# Altium PCB pcb.PcbDoc (part 6 of 6)
Units mm, origin at the board's own origin, x right, y up, seen from the top; angles counter-clockwise.
Board outline 163.6 x 137.4 mm, 4 copper layers (Top Layer, GND2, GND3, Bottom Layer), stack 1.586 mm thick; 362 components, 323 nets, 1261 pads, 657 vias.
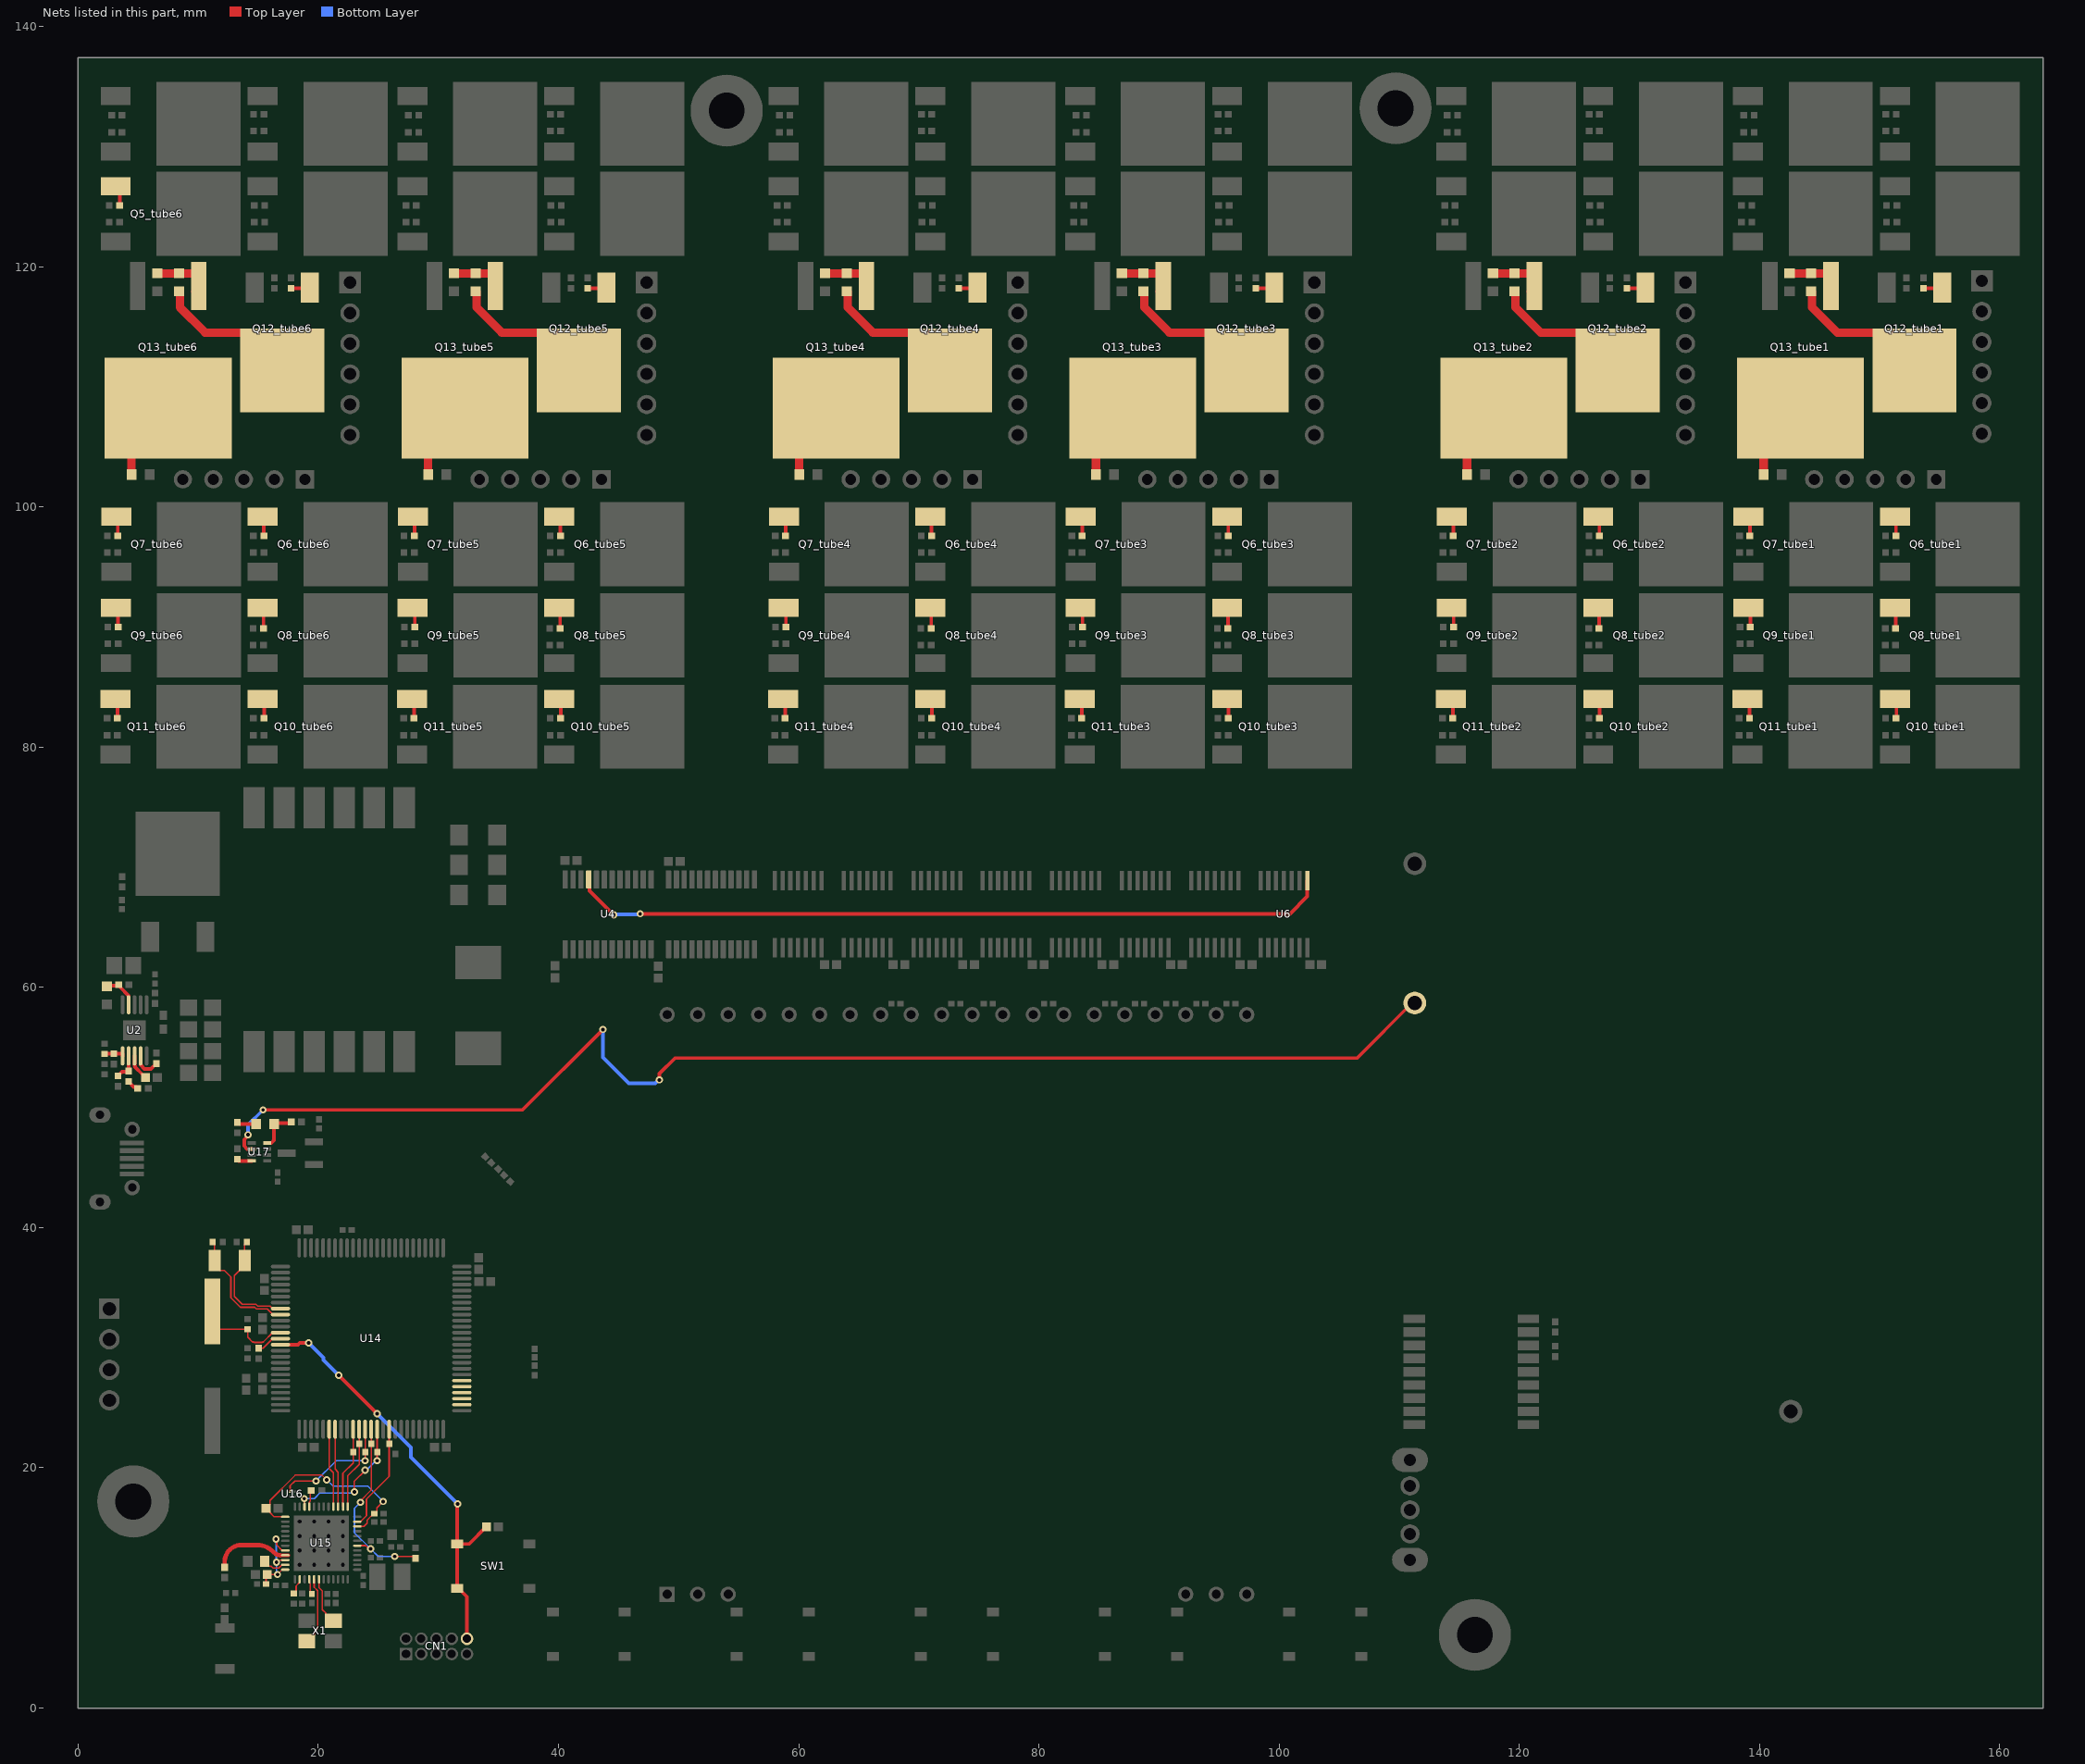
[diagram p7: the nets of this part, all layers, seen from the top]

## Via types
v1: diameter 0.6, hole 0.3, Top Layer to Bottom Layer, 545 vias
v2: diameter 1.27, hole 0.6, Top Layer to Bottom Layer, 97 vias
v3: diameter 1.27, hole 0.711, Top Layer to Bottom Layer, 13 vias
v4: diameter 0.5, hole 0.2, Top Layer to Bottom Layer, 2 vias

## Nets (pads, with @x,y where several pads share a name; then routed paths per layer and width w, separated by ;. In a path a pad name is that pad's centre, name@x,y a point inside that pad or via, vN(x,y) a via of type N, cw(c..) or ccw(c..) an arc to the next point about the centre after c; other vN are vias at no path point) (continued)
NetQ5_tube6_1: Q5_tube6.1 R18_tube6.2 | length 2.7
  Top Layer w0.3: R18_tube6.2@3.458,125.1 Q5_tube6.1@3.458,126.379 ; Q5_tube6.1@3.325,126.7 cw(c3.004,126.379) Q5_tube6.1@3.458,126.379 ; Q5_tube6.1@3.325,126.7 cw(c3.004,126.379) Q5_tube6.1@3.458,126.379 ; Q5_tube6.1@3.325,126.7 cw(c3.004,126.379) Q5_tube6.1@3.458,126.379 ; Q5_tube6.1@3.325,126.7 cw(c3.004,126.379) Q5_tube6.1@3.458,126.379
NetQ6_tube1_1: Q6_tube1.1 R20_tube1.2 | length 1.6
  Top Layer w0.3: Q6_tube1.1@151.269,99.2 cw(c151.037,98.968) 151.366,98.968 R20_tube1.2@151.366,97.6
NetQ6_tube2_1: Q6_tube2.1 R20_tube2.2 | length 1.6
  Top Layer w0.3: Q6_tube2.1@126.569,99.2 cw(c126.337,98.968) 126.666,98.968 R20_tube2.2@126.666,97.6
NetQ6_tube3_1: Q6_tube3.1 R20_tube3.2 | length 1.6
  Top Layer w0.3: Q6_tube3.1@95.669,99.2 cw(c95.437,98.968) 95.766,98.968 R20_tube3.2@95.766,97.6
NetQ6_tube4_1: Q6_tube4.1 R20_tube4.2 | length 1.6
  Top Layer w0.3: Q6_tube4.1@70.969,99.2 cw(c70.737,98.968) 71.066,98.968 R20_tube4.2@71.066,97.6
NetQ6_tube5_1: Q6_tube5.1 R20_tube5.2 | length 1.6
  Top Layer w0.3: Q6_tube5.1@40.069,99.2 cw(c39.837,98.968) 40.166,98.968 R20_tube5.2@40.166,97.6
NetQ6_tube6_1: Q6_tube6.1 R20_tube6.2 | length 1.6
  Top Layer w0.3: Q6_tube6.1@15.369,99.2 cw(c15.137,98.968) 15.466,98.968 R20_tube6.2@15.466,97.6
NetQ7_tube1_1: Q7_tube1.1 R22_tube1.2 | length 1.6
  Top Layer w0.3: Q7_tube1.1@139.067,99.2 cw(c138.747,98.879) 139.2,98.879 R22_tube1.2@139.2,97.6
NetQ7_tube2_1: Q7_tube2.1 R22_tube2.2 | length 1.6
  Top Layer w0.3: Q7_tube2.1@114.367,99.2 cw(c114.047,98.879) 114.5,98.879 R22_tube2.2@114.5,97.6
NetQ7_tube3_1: Q7_tube3.1 R22_tube3.2 | length 1.6
  Top Layer w0.3: Q7_tube3.1@83.467,99.2 cw(c83.147,98.879) 83.6,98.879 R22_tube3.2@83.6,97.6
NetQ7_tube4_1: Q7_tube4.1 R22_tube4.2 | length 1.6
  Top Layer w0.3: Q7_tube4.1@58.767,99.2 cw(c58.447,98.879) 58.9,98.879 R22_tube4.2@58.9,97.6
NetQ7_tube5_1: Q7_tube5.1 R22_tube5.2 | length 1.6
  Top Layer w0.3: Q7_tube5.1@27.867,99.2 cw(c27.547,98.879) 28,98.879 R22_tube5.2@28,97.6
NetQ7_tube6_1: Q7_tube6.1 R22_tube6.2 | length 1.6
  Top Layer w0.3: Q7_tube6.1@3.167,99.2 cw(c2.847,98.879) 3.3,98.879 R22_tube6.2@3.3,97.6
NetQ8_tube1_1: Q8_tube1.1 R24_tube1.2 | length 1.6
  Top Layer w0.3: Q8_tube1.1@151.3,91.5 cw(c151.221,91.421) 151.333,91.421 R24_tube1.2@151.333,89.9
NetQ8_tube2_1: Q8_tube2.1 R24_tube2.2 | length 1.6
  Top Layer w0.3: Q8_tube2.1@126.6,91.5 cw(c126.521,91.421) 126.633,91.421 R24_tube2.2@126.633,89.9
NetQ8_tube3_1: Q8_tube3.1 R24_tube3.2 | length 1.6
  Top Layer w0.3: Q8_tube3.1@95.7,91.5 cw(c95.621,91.421) 95.733,91.421 R24_tube3.2@95.733,89.9
NetQ8_tube4_1: Q8_tube4.1 R24_tube4.2 | length 1.6
  Top Layer w0.3: Q8_tube4.1@71,91.5 cw(c70.921,91.421) 71.033,91.421 R24_tube4.2@71.033,89.9
NetQ8_tube5_1: Q8_tube5.1 R24_tube5.2 | length 1.6
  Top Layer w0.3: Q8_tube5.1@40.1,91.5 cw(c40.021,91.421) 40.133,91.421 R24_tube5.2@40.133,89.9
NetQ8_tube6_1: Q8_tube6.1 R24_tube6.2 | length 1.6
  Top Layer w0.3: Q8_tube6.1@15.4,91.5 cw(c15.321,91.421) 15.433,91.421 R24_tube6.2@15.433,89.9
NetQ9_tube1_1: Q9_tube1.1 R26_tube1.2 | length 1.6
  Top Layer w0.3: Q9_tube1.1@139.158,91.6 cw(c138.977,91.419) 139.233,91.419 R26_tube1.2@139.233,90
NetQ9_tube2_1: Q9_tube2.1 R26_tube2.2 | length 1.6
  Top Layer w0.3: Q9_tube2.1@114.458,91.6 cw(c114.277,91.419) 114.533,91.419 R26_tube2.2@114.533,90
NetQ9_tube3_1: Q9_tube3.1 R26_tube3.2 | length 1.6
  Top Layer w0.3: Q9_tube3.1@83.558,91.6 cw(c83.377,91.419) 83.633,91.419 R26_tube3.2@83.633,90
NetQ9_tube4_1: Q9_tube4.1 R26_tube4.2 | length 1.6
  Top Layer w0.3: Q9_tube4.1@58.858,91.6 cw(c58.677,91.419) 58.933,91.419 R26_tube4.2@58.933,90
NetQ9_tube5_1: Q9_tube5.1 R26_tube5.2 | length 1.6
  Top Layer w0.3: Q9_tube5.1@27.958,91.6 cw(c27.777,91.419) 28.033,91.419 R26_tube5.2@28.033,90
NetQ9_tube6_1: Q9_tube6.1 R26_tube6.2 | length 1.6
  Top Layer w0.3: Q9_tube6.1@3.258,91.6 cw(c3.077,91.419) 3.333,91.419 R26_tube6.2@3.333,90
NetQ10_tube1_1: Q10_tube1.1 R28_tube1.2 | length 2.9
  Top Layer w0.3: Q10_tube1.1@151.158,84 cw(c150.977,83.819) Q10_tube1.1@151.233,83.819 ; R28_tube1.2@151.398,82.33 Q10_tube1.1@151.398,83.69 ; Q10_tube1.1@151.269,84 cw(c150.959,83.69) Q10_tube1.1@151.398,83.69 ; Q10_tube1.1@151.269,84 cw(c150.959,83.69) Q10_tube1.1@151.398,83.69 ; Q10_tube1.1@151.269,84 cw(c150.959,83.69) Q10_tube1.1@151.398,83.69 ; Q10_tube1.1@151.269,84 cw(c150.959,83.69) Q10_tube1.1@151.398,83.69
NetQ10_tube2_1: Q10_tube2.1 R28_tube2.2 | length 2.9
  Top Layer w0.3: Q10_tube2.1@126.458,84 cw(c126.277,83.819) Q10_tube2.1@126.533,83.819 ; R28_tube2.2@126.698,82.33 Q10_tube2.1@126.698,83.69 ; Q10_tube2.1@126.569,84 cw(c126.259,83.69) Q10_tube2.1@126.698,83.69 ; Q10_tube2.1@126.569,84 cw(c126.259,83.69) Q10_tube2.1@126.698,83.69 ; Q10_tube2.1@126.569,84 cw(c126.259,83.69) Q10_tube2.1@126.698,83.69 ; Q10_tube2.1@126.569,84 cw(c126.259,83.69) Q10_tube2.1@126.698,83.69
NetQ10_tube3_1: Q10_tube3.1 R28_tube3.2 | length 2.9
  Top Layer w0.3: Q10_tube3.1@95.558,84 cw(c95.377,83.819) Q10_tube3.1@95.633,83.819 ; R28_tube3.2@95.798,82.33 Q10_tube3.1@95.798,83.69 ; Q10_tube3.1@95.669,84 cw(c95.359,83.69) Q10_tube3.1@95.798,83.69 ; Q10_tube3.1@95.669,84 cw(c95.359,83.69) Q10_tube3.1@95.798,83.69 ; Q10_tube3.1@95.669,84 cw(c95.359,83.69) Q10_tube3.1@95.798,83.69 ; Q10_tube3.1@95.669,84 cw(c95.359,83.69) Q10_tube3.1@95.798,83.69
NetQ10_tube4_1: Q10_tube4.1 R28_tube4.2 | length 2.9
  Top Layer w0.3: Q10_tube4.1@70.858,84 cw(c70.677,83.819) Q10_tube4.1@70.933,83.819 ; R28_tube4.2@71.098,82.33 Q10_tube4.1@71.098,83.69 ; Q10_tube4.1@70.969,84 cw(c70.659,83.69) Q10_tube4.1@71.098,83.69 ; Q10_tube4.1@70.969,84 cw(c70.659,83.69) Q10_tube4.1@71.098,83.69 ; Q10_tube4.1@70.969,84 cw(c70.659,83.69) Q10_tube4.1@71.098,83.69 ; Q10_tube4.1@70.969,84 cw(c70.659,83.69) Q10_tube4.1@71.098,83.69
NetQ10_tube5_1: Q10_tube5.1 R28_tube5.2 | length 2.9
  Top Layer w0.3: Q10_tube5.1@39.958,84 cw(c39.777,83.819) Q10_tube5.1@40.033,83.819 ; R28_tube5.2@40.198,82.33 Q10_tube5.1@40.198,83.69 ; Q10_tube5.1@40.069,84 cw(c39.759,83.69) Q10_tube5.1@40.198,83.69 ; Q10_tube5.1@40.069,84 cw(c39.759,83.69) Q10_tube5.1@40.198,83.69 ; Q10_tube5.1@40.069,84 cw(c39.759,83.69) Q10_tube5.1@40.198,83.69 ; Q10_tube5.1@40.069,84 cw(c39.759,83.69) Q10_tube5.1@40.198,83.69
NetQ10_tube6_1: Q10_tube6.1 R28_tube6.2 | length 2.9
  Top Layer w0.3: Q10_tube6.1@15.258,84 cw(c15.077,83.819) Q10_tube6.1@15.333,83.819 ; R28_tube6.2@15.498,82.33 Q10_tube6.1@15.498,83.69 ; Q10_tube6.1@15.369,84 cw(c15.059,83.69) Q10_tube6.1@15.498,83.69 ; Q10_tube6.1@15.369,84 cw(c15.059,83.69) Q10_tube6.1@15.498,83.69 ; Q10_tube6.1@15.369,84 cw(c15.059,83.69) Q10_tube6.1@15.498,83.69 ; Q10_tube6.1@15.369,84 cw(c15.059,83.69) Q10_tube6.1@15.498,83.69
NetQ11_tube1_1: Q11_tube1.1 R31_tube1.2 | length 2.9
  Top Layer w0.3: R31_tube1.2@139.166,82.4 Q11_tube1.1@139.166,83.624 ; Q11_tube1.1@139.01,84 cw(c138.634,83.624) Q11_tube1.1@139.166,83.624 ; Q11_tube1.1@139.01,84 cw(c138.634,83.624) Q11_tube1.1@139.166,83.624 ; Q11_tube1.1@139.01,84 cw(c138.634,83.624) Q11_tube1.1@139.166,83.624 ; Q11_tube1.1@139.01,84 cw(c138.634,83.624) Q11_tube1.1@139.166,83.624
NetQ11_tube2_1: Q11_tube2.1 R31_tube2.2 | length 2.9
  Top Layer w0.3: R31_tube2.2@114.466,82.4 Q11_tube2.1@114.466,83.624 ; Q11_tube2.1@114.31,84 cw(c113.934,83.624) Q11_tube2.1@114.466,83.624 ; Q11_tube2.1@114.31,84 cw(c113.934,83.624) Q11_tube2.1@114.466,83.624 ; Q11_tube2.1@114.31,84 cw(c113.934,83.624) Q11_tube2.1@114.466,83.624 ; Q11_tube2.1@114.31,84 cw(c113.934,83.624) Q11_tube2.1@114.466,83.624
NetQ11_tube3_1: Q11_tube3.1 R31_tube3.2 | length 2.9
  Top Layer w0.3: R31_tube3.2@83.566,82.4 Q11_tube3.1@83.566,83.624 ; Q11_tube3.1@83.41,84 cw(c83.034,83.624) Q11_tube3.1@83.566,83.624 ; Q11_tube3.1@83.41,84 cw(c83.034,83.624) Q11_tube3.1@83.566,83.624 ; Q11_tube3.1@83.41,84 cw(c83.034,83.624) Q11_tube3.1@83.566,83.624 ; Q11_tube3.1@83.41,84 cw(c83.034,83.624) Q11_tube3.1@83.566,83.624
NetQ11_tube4_1: Q11_tube4.1 R31_tube4.2 | length 2.9
  Top Layer w0.3: R31_tube4.2@58.866,82.4 Q11_tube4.1@58.866,83.624 ; Q11_tube4.1@58.71,84 cw(c58.334,83.624) Q11_tube4.1@58.866,83.624 ; Q11_tube4.1@58.71,84 cw(c58.334,83.624) Q11_tube4.1@58.866,83.624 ; Q11_tube4.1@58.71,84 cw(c58.334,83.624) Q11_tube4.1@58.866,83.624 ; Q11_tube4.1@58.71,84 cw(c58.334,83.624) Q11_tube4.1@58.866,83.624
NetQ11_tube5_1: Q11_tube5.1 R31_tube5.2 | length 2.9
  Top Layer w0.3: R31_tube5.2@27.966,82.4 Q11_tube5.1@27.966,83.624 ; Q11_tube5.1@27.81,84 cw(c27.434,83.624) Q11_tube5.1@27.966,83.624 ; Q11_tube5.1@27.81,84 cw(c27.434,83.624) Q11_tube5.1@27.966,83.624 ; Q11_tube5.1@27.81,84 cw(c27.434,83.624) Q11_tube5.1@27.966,83.624 ; Q11_tube5.1@27.81,84 cw(c27.434,83.624) Q11_tube5.1@27.966,83.624
NetQ11_tube6_1: Q11_tube6.1 R31_tube6.2 | length 2.9
  Top Layer w0.3: R31_tube6.2@3.266,82.4 Q11_tube6.1@3.266,83.624 ; Q11_tube6.1@3.11,84 cw(c2.734,83.624) Q11_tube6.1@3.266,83.624 ; Q11_tube6.1@3.11,84 cw(c2.734,83.624) Q11_tube6.1@3.266,83.624 ; Q11_tube6.1@3.11,84 cw(c2.734,83.624) Q11_tube6.1@3.266,83.624 ; Q11_tube6.1@3.11,84 cw(c2.734,83.624) Q11_tube6.1@3.266,83.624
NetQ12_tube1_1: Q12_tube1.1 R30_tube1.1 | length 1.4
  Top Layer w0.3: R30_tube1.1@153.643,118.212 Q12_tube1.1@155.048,118.212
NetQ12_tube1_4: Q12_tube1.4 R34_tube1.2 | length 12.1
  Top Layer w0.7: R34_tube1.2@144.3,117.947 144.329,117.947 144.382,117.893 144.382,116.619 146.476,114.525 149.75,114.525 Q12_tube1.4@152.9,111.375
NetQ12_tube2_1: Q12_tube2.1 R30_tube2.1 | length 1.4
  Top Layer w0.3: R30_tube2.1@128.943,118.212 Q12_tube2.1@130.348,118.212
NetQ12_tube2_4: Q12_tube2.4 R34_tube2.2 | length 12.1
  Top Layer w0.7: R34_tube2.2@119.6,117.947 119.629,117.947 119.682,117.893 119.682,116.619 121.776,114.525 125.05,114.525 Q12_tube2.4@128.2,111.375
NetQ12_tube3_1: Q12_tube3.1 R30_tube3.1 | length 1.4
  Top Layer w0.3: R30_tube3.1@98.043,118.212 Q12_tube3.1@99.448,118.212
NetQ12_tube3_4: Q12_tube3.4 R34_tube3.2 | length 12.1
  Top Layer w0.7: R34_tube3.2@88.7,117.947 88.729,117.947 88.782,117.893 88.782,116.619 90.876,114.525 94.15,114.525 Q12_tube3.4@97.3,111.375
NetQ12_tube4_1: Q12_tube4.1 R30_tube4.1 | length 1.4
  Top Layer w0.3: R30_tube4.1@73.343,118.212 Q12_tube4.1@74.748,118.212
NetQ12_tube4_4: Q12_tube4.4 R34_tube4.2 | length 12.1
  Top Layer w0.7: R34_tube4.2@64,117.947 64.029,117.947 64.082,117.893 64.082,116.619 66.176,114.525 69.45,114.525 Q12_tube4.4@72.6,111.375
NetQ12_tube5_1: Q12_tube5.1 R30_tube5.1 | length 1.4
  Top Layer w0.3: R30_tube5.1@42.443,118.212 Q12_tube5.1@43.848,118.212
NetQ12_tube5_4: Q12_tube5.4 R34_tube5.2 | length 12.1
  Top Layer w0.7: R34_tube5.2@33.1,117.947 33.129,117.947 33.182,117.893 33.182,116.619 35.276,114.525 38.55,114.525 Q12_tube5.4@41.7,111.375
NetQ12_tube6_1: Q12_tube6.1 R30_tube6.1 | length 1.4
  Top Layer w0.3: R30_tube6.1@17.743,118.212 Q12_tube6.1@19.148,118.212
NetQ12_tube6_4: Q12_tube6.4 R34_tube6.2 | length 12.1
  Top Layer w0.7: R34_tube6.2@8.4,117.947 8.429,117.947 8.482,117.893 8.482,116.619 10.576,114.525 13.85,114.525 Q12_tube6.4@17,111.375
NetQ13_tube1_1: Q13_tube1.1 R33_tube1.2 R34_tube1.1 | length 4.9
  Top Layer w0.7: R33_tube1.2@142.5,119.453 145.64,119.453 145.94,119.153 Q13_tube1.1@145.94,118.386 145.94,118.247 Q13_tube1.1@145.64,117.947
NetQ13_tube1_4: Q13_tube1.4 R35_tube1.1 | length 6.8
  Top Layer w0.7: R35_tube1.1@140.347,102.7 140.347,105.161 Q13_tube1.4@143.4,108.214
NetQ13_tube2_1: Q13_tube2.1 R33_tube2.2 R34_tube2.1 | length 4.9
  Top Layer w0.7: R33_tube2.2@117.8,119.453 120.94,119.453 121.24,119.153 Q13_tube2.1@121.24,118.386 121.24,118.247 Q13_tube2.1@120.94,117.947
NetQ13_tube2_4: Q13_tube2.4 R35_tube2.1 | length 6.8
  Top Layer w0.7: R35_tube2.1@115.647,102.7 115.647,105.161 Q13_tube2.4@118.7,108.214
NetQ13_tube3_1: Q13_tube3.1 R33_tube3.2 R34_tube3.1 | length 4.9
  Top Layer w0.7: R33_tube3.2@86.9,119.453 90.04,119.453 90.34,119.153 Q13_tube3.1@90.34,118.386 90.34,118.247 Q13_tube3.1@90.04,117.947
NetQ13_tube3_4: Q13_tube3.4 R35_tube3.1 | length 6.8
  Top Layer w0.7: R35_tube3.1@84.747,102.7 84.747,105.161 Q13_tube3.4@87.8,108.214
NetQ13_tube4_1: Q13_tube4.1 R33_tube4.2 R34_tube4.1 | length 4.9
  Top Layer w0.7: R33_tube4.2@62.2,119.453 65.34,119.453 65.64,119.153 Q13_tube4.1@65.64,118.386 65.64,118.247 Q13_tube4.1@65.34,117.947
NetQ13_tube4_4: Q13_tube4.4 R35_tube4.1 | length 6.8
  Top Layer w0.7: R35_tube4.1@60.047,102.7 60.047,105.161 Q13_tube4.4@63.1,108.214
NetQ13_tube5_1: Q13_tube5.1 R33_tube5.2 R34_tube5.1 | length 4.9
  Top Layer w0.7: R33_tube5.2@31.3,119.453 34.44,119.453 34.74,119.153 Q13_tube5.1@34.74,118.386 34.74,118.247 Q13_tube5.1@34.44,117.947
NetQ13_tube5_4: Q13_tube5.4 R35_tube5.1 | length 6.8
  Top Layer w0.7: R35_tube5.1@29.147,102.7 29.147,105.161 Q13_tube5.4@32.2,108.214
NetQ13_tube6_1: Q13_tube6.1 R33_tube6.2 R34_tube6.1 | length 4.9
  Top Layer w0.7: R33_tube6.2@6.6,119.453 9.74,119.453 10.04,119.153 Q13_tube6.1@10.04,118.386 10.04,118.247 Q13_tube6.1@9.74,117.947
NetQ13_tube6_4: Q13_tube6.4 R35_tube6.1 | length 6.8
  Top Layer w0.7: R35_tube6.1@4.447,102.7 4.447,105.161 Q13_tube6.4@7.5,108.214
NetR2_1: R2.1 R3.2 | length 1
  Top Layer w0.3: R3.2@4.2,52.167 4.2,52.154 4.634,51.72 4.847,51.72 R2.1@4.967,51.6
NetR3_1: R3.1 R7.2 U2.2 | length 2.3
  Top Layer w0.3: R7.2@3.3,52.633 3.3,52.646 3.42,52.766 3.433,52.766 3.656,52.989 4.169,52.989 R3.1@4.2,53.02 ; R3.1@4.2,53.033 U2.2@4.2,54.3
NetR4_1: R4.1 R6.2 U2.9 | length 2.9
  Top Layer w0.3: R4.1@2.4,60.078 2.473,60.152 3.294,60.152 R6.2@3.367,60.225 ; R6.2@3.5,60.105 3.5,60.013 4.2,59.313 U2.9@4.2,58.55
NetR38_1: R38.1 U15.45 | length 1.4
  Top Layer w0.127: U15.45@19.248,16.773 19.262,16.787 19.262,17.18 19.32,17.237 19.32,18.027 R38.1@19.416,18.123
NetR41_1: R41.1 U17.8 | length 1.3
  Top Layer w0.3: R41.1@13.255,45.695 13.255,45.682 13.387,45.55 U17.8@14.46,45.55
NetR42_1: R42.1 R43.2 | length 1.5
  Top Layer w0.3: R42.1@13.355,48.761 13.355,48.748 13.475,48.628 R43.2@14.802,48.628
NetR43_1: R43.1 R44.2 U17.4 | length 3.5
  Top Layer w0.3: U17.4@15.75,47.06 16.087,47.06 16.308,47.281 R43.1@16.308,48.628 16.394,48.714 17.648,48.714 R44.2@17.734,48.8
NetU15_17: U15.17 X1.1 | length 5.8
  Top Layer w0.127: X1.1@19.048,5.573 19.148,5.573 19.685,6.11 19.685,6.34 19.939,6.594 19.939,9.775 19.648,10.065 U15.17@19.648,10.723 ; X1.1@19.048,5.873 X1.1@19.148,5.873
NetU15_18: U15.18 X1.3 | length 4.1
  Top Layer w0.127: U15.18@20.048,10.723 20.048,10.024 20.322,9.751 20.322,8.2 20.612,7.91 20.612,7.81 21.149,7.273 X1.3@21.249,7.273 ; X1.3@21.149,7.573 X1.3@21.249,7.573
NetU17_6: U17.6 U20.1 | length 109.4
  Top Layer w0.3: v1(14.155,47.728) 14.155,47.647 13.843,47.335 13.843,46.795 14.078,46.56 14.45,46.56 U17.6@14.46,46.55 ; v1(15.4,49.8) 37,49.8 v1(43.7,56.5) ; v1(48.4,52.3) 48.4,52.82 49.698,54.118 106.482,54.118 111.064,58.7 U20.1@111.3,58.7
  Bottom Layer w0.3: v1@14.105,47.778 v1(14.155,47.728) 14.155,48.555 v1(15.4,49.8) ; v1(43.7,56.5) 43.7,54.184 45.861,52.023 48.042,52.023 48.319,52.3 v1(48.4,52.3)
NRST: C38.1 CN1.10 SW1.2 SW1.4 U14.14 | length 35.6
  Top Layer w0.3: U14.14@16.849,30.26 18.3,30.26 18.44,30.4 v1(19.2,30.4) ; v1(21.7,27.7) v1(24.9,24.5) ; v1(31.6,17) 31.565,16.965 SW1.4@31.565,13.66 ; CN1.10@32.38,5.77 32.38,9.27 31.69,9.96 SW1.2@31.565,9.96 SW1.4@31.565,13.66 ; C38.1@33.99,15.1 32.55,13.66 SW1.4@31.565,13.66
  Bottom Layer w0.3: v1(19.2,30.4) 20.43,29.17 20.43,28.97 v1(21.7,27.7) ; v1(24.9,24.5) 27.696,21.704 27.696,20.888 31.584,17 v1(31.6,17)
OSC32_IN: C31.2 U14.8 X2.2 | length 9.2
  Top Layer w0.127: C31.2@14.034,38.815 13.864,38.645 X2.2@13.864,37.265 13.864,36.865 13.014,36.015 13.014,34.283 13.673,33.624 14.801,33.624 14.948,33.478 15.982,33.478 16.2,33.26 U14.8@16.849,33.26
OSC32_OUT: C32.2 U14.9 X2.1 | length 10.2
  Top Layer w0.127: C32.2@11.194,38.815 11.364,38.645 X2.1@11.364,37.265 11.364,36.865 11.801,36.428 12.177,36.428 12.714,35.891 12.714,34.165 13.514,33.365 14.702,33.365 14.843,33.224 15.736,33.224 16.2,32.76 U14.9@16.849,32.76
OSC_IN: C35.2 U14.12 X3.1 | length 7.9
  Top Layer w0.127: X3.1@11.314,33.018 11.314,32.007 11.777,31.545 C35.2@14.114,31.545 14.114,30.876 14.516,30.474 14.632,30.474 14.67,30.436 15.33,30.436 15.368,30.474 15.414,30.474 16.2,31.26 U14.12@16.849,31.26
OSC_OUT: R36.2 U14.13 | length 2.2
  Top Layer w0.127: R36.2@15.014,29.963 15.402,29.963 16.2,30.76 U14.13@16.849,30.76
PALDO: C30.2 C40.1 U15.8 U15.10 U15.12 | length 7.9
  Top Layer w0.127: C40.1@15.648,10.323 15.648,11.033 C30.2@15.738,11.123 v1(16.598,11.123) 16.998,11.523 U15.12@17.248,11.523 ; v1(16.472,14.066) 16.535,14.003 16.535,13.575 16.988,13.123 U15.8@17.248,13.123 ; v1(16.512,12.141) 16.64,12.141 16.808,12.309 17.234,12.309 U15.10@17.248,12.323
  Bottom Layer w0.127: v1(16.472,14.066) 16.492,14.046 16.492,12.162 v1(16.512,12.141) v1@16.512,11.209 ; v1@16.512,11.209 ccw(c16.598,11.209) v1(16.598,11.123) cw(c16.598,11.209) v1@16.512,11.209
PWRIOVDD: C27.1 C45.1 U15.1 U15.34 | length 17.2
  Top Layer w0.127: U15.1@17.248,15.923 16.329,15.923 15.975,16.277 15.975,16.327 15.678,16.623 15.975,16.92 15.975,17.293 18.072,19.39 20.309,19.39 v1(20.7,19) ; U15.34@23.248,15.123 23.789,15.123 24.061,15.395 24.061,15.653 24.434,16.025 24.497,16.025 C45.1@24.67,16.198 24.691,16.198 24.864,16.371 24.864,16.664 v1(25.4,17.2)
  Bottom Layer w0.127: v1(20.7,19) 21.21,18.491 24.109,18.491 v1(25.4,17.2)
RF_2.4GHZ: C41.2 U15.9 | length 15.3
  Top Layer w0.32: 16.818,12.723 U15.9@17.248,12.723 U15.9@17.502,12.723
  Top Layer w0.367: C41.2@12.202,11.731 12.202,12.188 ; 12.202,12.188 cw(c13.587,12.188) 13.587,13.573 ; 12.202,12.188 cw(c13.587,12.188) 13.587,13.573 ; 12.202,12.188 cw(c13.587,12.188) 13.587,13.573 ; 12.202,12.188 cw(c13.587,12.188) 13.587,13.573 ; 13.587,13.573 14.896,13.573 ; 14.896,13.573 cw(c14.896,11.669) 16.242,13.016 ; 14.896,13.573 cw(c14.896,11.669) 16.242,13.016 ; 16.242,13.016 16.335,12.923 ; 16.335,12.923 ccw(c16.818,13.406) 16.818,12.723 cw(c16.818,13.406) 16.335,12.923
RFVDD: C43.1 U15.14 | length 1.4
  Top Layer w0.127: C43.1@17.948,9.543 17.968,9.543 18.155,9.73 18.155,10.169 18.448,10.462 U15.14@18.448,10.723
RT: R9.2 U2.4 | length 2.4
  Top Layer w0.3: U2.4@5.2,54.3 5.2,53.546 5.523,53.223 6.069,53.223 6.5,53.654 R9.2@6.5,53.667
SHIFT_IN_5V: U4.21 U6.1 | length 63.5
  Top Layer w0.3: U4.21@42.51,68.981 42.585,68.906 42.585,68.052 v1(44.596,66.042) ; v1(46.8,66.131) 100.897,66.131 102.35,67.584 U6.1@102.35,68.9
  Bottom Layer w0.3: v1(44.596,66.042) 44.64,66.086 46.755,66.086 v1(46.8,66.131)
SPI2_CLK: U14.52
SPI2_MISO: U14.53
SPI2_MOSI: U14.54
SS: C13.1 U2.3 | length 2.2
  Top Layer w0.3: U2.3@4.7,54.3 4.7,53.477 4.747,53.43 4.747,53.363 5.38,52.73 5.38,52.71 5.59,52.5 C13.1@5.61,52.5
SXLDO: C39.1 U15.11 | length 2
  Top Layer w0.127: C39.1@15.548,12.152 15.877,11.823 16.048,11.823 16.22,11.651 16.716,11.651 16.988,11.923 U15.11@17.248,11.923
USART3_RX: U14.56
USART3_TX: U14.55
VC: C11.2 R10.1 U2.1 | length 1.7
  Top Layer w0.3: C11.2@2.2,54.48 2.202,54.482 2.968,54.482 R10.1@2.97,54.483 3.7,54.483 U2.1@3.7,54.3
WIFI_BUCK_EN: pad.13@24.4,22 R37.1 U14.38 U15.30 | length 16.2
  Top Layer w0.127: U15.30@23.248,13.523 23.957,13.523 24.22,13.26 v1(24.348,13.26) ; v1(23.5,17.127) 23.5,17.253 24.399,18.152 U14.38@24.399,23.21 ; v1(26.348,12.623) 27.816,12.623 R37.1@27.948,12.49
  Bottom Layer w0.127: v1(23.5,17.127) 23.01,16.637 23.01,14.599 v1(24.348,13.26) 24.985,12.623 v1(26.348,12.623)
WIFI_HOST_IRQ: pad.13@24.9,21.3 U14.39 U15.46 | length 11.2
  Top Layer w0.127: v1(18.83,17.441) 18.839,17.431 18.839,16.782 U15.46@18.848,16.773 ; v1(23,18) 23,18.9 v1(23.9,19.8) ; v1(24.89,20.6) 24.895,20.605 24.895,23.205 U14.39@24.9,23.21
  Bottom Layer w0.127: v1(18.83,17.441) 19.668,17.441 20.141,17.914 22.914,17.914 v1(23,18) ; v1(23.9,19.8) 23.995,19.8 24.795,20.6 v1(24.89,20.6)
WIFI_IOVDD_EN: pad.13@23.9,21.3 U14.37 U16.B2 | length 10.2
  Top Layer w0.127: U16.B2@17.649,18.023 17.649,18.517 18.045,18.914 19.786,18.914 v1(19.8,18.9) ; v1(23.9,20.6) U14.37@23.9,23.21
  Bottom Layer w0.127: v1(19.8,18.9) 21.5,20.6 v1(23.9,20.6)
WIFI_QSPI_CLK: pad.13@25.9,22 U14.41 U15.35 | length 8.9
  Top Layer w0.127: U15.35@23.248,15.523 23.509,15.523 24.01,16.023 24.01,17.403 25.9,19.293 U14.41@25.9,23.21
WIFI_QSPI_DATA0: pad.13@23.4,22 U14.36 U15.37 | length 6.8
  Top Layer w0.127: U15.37@22.448,16.773 22.448,19.348 23.399,20.299 U14.36@23.399,23.21
WIFI_QSPI_DATA1: pad.13@22.9,21.3 U14.35 U15.38 | length 6.8
  Top Layer w0.127: U15.38@22.048,16.773 22.048,19.548 22.899,20.399 U14.35@22.899,23.21
WIFI_QSPI_DATA2: U14.32 U15.39 | length 6.5
  Top Layer w0.127: U14.32@21.399,23.21 21.399,19.893 21.648,19.644 U15.39@21.648,16.773
WIFI_QSPI_DATA3: U14.31 U15.40 | length 6.6
  Top Layer w0.127: U14.31@20.899,23.21 20.899,19.936 21.248,19.587 U15.40@21.248,16.773
XOLDO: C47.1 U15.16 | length 1.3
  Top Layer w0.127: U15.16@19.248,10.723 19.248,10.453 19.339,10.363 19.339,9.611 C47.1@19.448,9.502
pads on no net: CN1.7 DS1.1 DS1.2 DS1.3 DS1.18 DS1.19 DS1.20 E1.2 MD1.2 MD1.3 MD1.9 MD1.13 MD1.14 MD1.15 MD1.18 SW2.3 SW2.4 SW2.5 U1.2 U1.11 U4.14 U4.15 U4.16 U4.17 U4.18 U4.23 U5.14 U5.15 U5.23 U13.10 U13.11 U13.12 U13.13 U14.1 U14.2 U14.3 U14.4 U14.5 U14.7 U14.23 U14.24 U14.29 U14.30 U14.33 U14.34 U14.40 U14.48 U14.66 U14.67 U14.70 U14.71 U14.78 U14.79 U14.80 U14.81 U14.82 U14.90 U14.91 U14.92 U14.93 U14.95 U14.96 U14.97 U14.98 U15.2 U15.3 U15.4 U15.5 U15.6 U15.21 U15.22 U15.23 U15.24 U15.43 U15.44 USB1.2 USB1.3 USB1.4 USB1.6 USB1.7 USB1.8 USB1.9

## Polygon pours and split planes (outlines as drawn)
3V3 on Bottom Layer "3V3_L04_P068" (solid, pour order 68): 1.3,40.6 37.3,40.6 48,51.3 48,59 98.7,59 123.9,33.8 123.9,1.1 17.1,1.1 17.1,9.6 1.3,9.6
5V on Bottom Layer "5V_L04_P066" (solid, pour order 66): 1.2,50.6 1.2,77.4 23.3,77.4 23.6,77.7 23.6,51.8 38.1,51.8 38.1,72 104.2,72 104.2,59.6 46.6,59.6 46.6,51.5 36.5,41.4 1.3,41.4
3V3 on Bottom Layer "3V3_L04_P056" (solid, pour order 56): 107.7,33.8 121.3,33.8 121.3,22.2 107.7,22.2
5V on Bottom Layer "5V_L04_P058" (solid, pour order 58): 40.135,72.181 57.635,72.181 57.635,66.681 40.135,66.681
5V on Bottom Layer "5V_L04_P059" (solid, pour order 59): 102.95,60.5 60.65,60.5 60.65,68.35 102.95,68.35
GND on GND2 "GND_L02_P051" (solid, pour order 51): -2.2,147.5 -1.948,147.248 207.35,147.248 207.35,0.85 207.7,0.5 -2.2,0.5
GND on GND2 "GND_L02_P048" (solid, pour order 48): 8.49,22.107 8.49,34.865 9.59,35.965 11.89,35.965 12.19,35.665 12.19,33.848 13.273,32.765 14.69,32.765 14.69,30.979 14.759,30.91 14.76,30.91 15.624,30.91 16.136,31.422 18.39,31.422 18.39,30.602 16.141,30.602 15.69,30.151 15.69,28.828 15.227,28.365 13.69,28.365 13.29,27.965 13.29,26.065 13.79,25.565 13.79,21.765 12.91,20.885 9.816,20.885
GND on GND2 "GND_L02_P050" (solid, pour order 50): 9.89,39.165 10.69,39.965 14.29,39.965 15.09,39.165 15.09,36.765 14.29,35.965 14.29,34.065 15.69,34.065 15.69,33.865 16.139,33.416 18.39,33.416 18.39,32.615 16.169,32.615 16.103,32.681 16.103,32.765 16.093,32.765 15.559,33.3 15.55,33.291 14.651,33.291 14.651,33.103 14.614,33.066 13.315,33.066 12.432,33.95 12.432,35.811 12.013,36.23 9.89,36.23
GND on GND3 "GND_L03_P053" (solid, pour order 53): 178.4,-11 178.4,77.5 -33.1,77.5 -33.1,-11
170V on GND3 "170V_L03_P047" (solid, pour order 47): 1.4,77.7 1.4,136 25.9,136 36.2,136 162.2,136 162.2,77.7 37.5,77.7 37.5,52.8 25.9,52.8 25.9,77.7
GND on Top Layer "Top Layer-GND" (solid, pour order 69): 142.965,26.499 143.183,26.441 143.184,26.441 143.418,26.343 143.479,26.308 143.614,26.23 143.816,26.076 143.896,25.996 143.976,25.916 144.13,25.714 144.186,25.618 144.243,25.518 144.341,25.284 144.399,25.065 144.432,24.813 144.432,24.7 144.432,24.587 144.399,24.335 144.341,24.116 144.243,23.882 144.208,23.821 144.13,23.686 143.976,23.484 143.896,23.404 143.816,23.324 143.614,23.17 143.518,23.114 143.418,23.057 143.184,22.959 143.183,22.959 142.965,22.901 142.713,22.868 142.6,22.868 142.487,22.868 142.235,22.901 142.016,22.959 141.782,23.057 141.721,23.092 141.586,23.17 141.384,23.324 141.304,23.404 141.224,23.484 141.1,23.646 122.209,23.646 122.083,23.55 121.874,23.463 121.65,23.434 119.85,23.434 119.626,23.463 119.417,23.55 119.237,23.687 119.1,23.867 119.013,24.076 118.984,24.3 118.984,25.1 119.013,25.324 119.1,25.533 119.237,25.713 119.417,25.85 119.626,25.937 119.85,25.966 121.65,25.966 121.874,25.937 122.083,25.85 122.209,25.754 141.1,25.754 141.224,25.916 141.304,25.996 141.384,26.076 141.586,26.23 141.682,26.286 141.782,26.343 142.016,26.441 142.235,26.499 142.487,26.532 142.6,26.532 142.713,26.532

## Other copper
Top Layer:
  pour cut-out: 0,0 16.402,0 16.402,8.973 0,8.973
  region net GND: 9.9,59.4 9.9,51.6 8,51.6 8,55 7.7,55.3 6.8,56.2 6.825,56.225 6.825,56.875 7.375,56.875 8.1,57.6 8.1,58.545 8.955,59.4
  region net NetD1_2: 26.2,56.4 35.2,56.4 35.2,53.5 34.6,52.9 26.2,52.9
  region net 5V: 23.1,56.303 23.1,53 22.3,52.2 10.5,52.2 10.5,59 20.204,59
  region net GND: 26.2,76.693 29.307,76.693 32.45,73.55 32.45,66.836 30.357,66.836 26.2,70.993
  region net NetQ1_4: 17.4,67.7 23,73.3 23,76.7 13.8,76.7 11.7,74.6 11.2,74.6 11.2,67.7
  region net 170V: 31.4,60.6 35.2,60.6 36.1,61.5 36.1,73.564 34.164,73.564 33.3,72.7 33.3,66.4 32.6,65.7 31.4,64.5
GND2:
  pour cut-out: 0,0 16.402,0 16.402,8.973 0,8.973
GND3:
  pour cut-out: 8.29,21.665 8.29,34.965 9.69,36.365 9.69,39.265 10.59,40.165 14.39,40.165 15.39,39.165 15.39,36.565 14.49,35.665 14.49,34.365 15.79,34.365 15.89,34.265 15.89,33.865 16.19,33.565 18.59,33.565 18.59,32.406 15.89,32.406 15.89,32.865 15.55,33.205 14.839,33.205 14.839,31.116 14.89,31.065 15.59,31.065 16.1,31.575 18.59,31.575 18.59,30.465 16.19,30.465 15.89,30.165 15.89,28.641 15.314,28.065 13.79,28.065 13.59,27.865 13.59,26.265 14.09,25.765 14.09,21.565 13.09,20.565 9.39,20.565
  pour cut-out: 0,0 16.402,0 16.402,8.973 0,8.973
Bottom Layer:
  pour cut-out: 8.29,21.665 8.29,34.965 9.69,36.365 9.69,39.265 10.59,40.165 14.39,40.165 15.39,39.165 15.39,36.565 14.49,35.665 14.49,34.365 15.79,34.365 15.89,34.265 15.89,33.865 16.19,33.565 18.59,33.565 18.59,32.406 15.89,32.406 15.89,32.865 15.55,33.205 14.839,33.205 14.839,31.116 14.89,31.065 15.59,31.065 16.1,31.575 18.59,31.575 18.59,30.465 16.19,30.465 15.89,30.165 15.89,28.641 15.314,28.065 13.79,28.065 13.59,27.865 13.59,26.265 14.09,25.765 14.09,21.565 13.09,20.565 9.39,20.565
  pour cut-out: 0,0 16.402,0 16.402,8.973 0,8.973

## Silkscreen, mask and mechanical layers (free items; w line width, h text height)
Top Overlay:
  lines w0.254: 2.3,112.691 2.3,117.55 cw(c7.38,117.55) 2.971,120.073 ; 2.423,103.737 ccw(c7.38,104.85) 6.29,99.888 ; 4.652,121.835 cw(c7.38,117.55) 6.248,122.502 ; 16.896,99.77 18.492,99.77 ; 16.896,122.63 18.492,122.63 ; 17.54,101.04 17.54,103.58 ; 21.35,117.461 21.35,104.85 23.89,104.85 23.89,120.09 21.35,120.09 21.35,118.939 ; 22.977,100.677 ccw(c20.08,104.85) 25.16,104.85 25.16,117.55 ccw(c20.08,117.55) 24.125,120.623 ; 27,112.691 27,117.55 cw(c32.08,117.55) 27.671,120.073 ; 27.123,103.737 ccw(c32.08,104.85) 30.99,99.888 ; 29.352,121.835 cw(c32.08,117.55) 30.948,122.502 ; 41.596,99.77 43.192,99.77 ; 41.596,122.63 43.192,122.63 ; 42.24,101.04 42.24,103.58 ; 46.05,117.461 46.05,104.85 48.59,104.85 48.59,120.09 46.05,120.09 46.05,118.939 ; 47.677,100.677 ccw(c44.78,104.85) 49.86,104.85 49.86,117.55 ccw(c44.78,117.55) 48.825,120.623 ; 57.9,112.691 57.9,117.55 cw(c62.98,117.55) 58.571,120.073 ; 58.023,103.737 ccw(c62.98,104.85) 61.89,99.888 ; 60.252,121.835 cw(c62.98,117.55) 61.848,122.502 ; 72.496,99.77 74.092,99.77 ; 72.496,122.63 74.092,122.63 ; 73.14,101.04 73.14,103.58 ; 76.95,117.461 76.95,104.85 79.49,104.85 79.49,120.09 76.95,120.09 76.95,118.939 ; 78.577,100.677 ccw(c75.68,104.85) 80.76,104.85 80.76,117.55 ccw(c75.68,117.55) 79.725,120.623 ; 82.6,112.691 82.6,117.55 cw(c87.68,117.55) 83.271,120.073 ; 82.723,103.737 ccw(c87.68,104.85) 86.59,99.888 ; 84.952,121.835 cw(c87.68,117.55) 86.548,122.502 ; 97.196,99.77 98.792,99.77 ; 97.196,122.63 98.792,122.63 ; 97.84,101.04 97.84,103.58 ; 101.65,117.461 101.65,104.85 104.19,104.85 104.19,120.09 101.65,120.09 101.65,118.939 ; 103.277,100.677 ccw(c100.38,104.85) 105.46,104.85 105.46,117.55 ccw(c100.38,117.55) 104.425,120.623 ; 113.5,112.691 113.5,117.55 cw(c118.58,117.55) 114.171,120.073 ; 113.623,103.737 ccw(c118.58,104.85) 117.49,99.888 ; 115.852,121.835 cw(c118.58,117.55) 117.448,122.502 ; 128.096,99.77 129.692,99.77 ; 128.096,122.63 129.692,122.63 ; 128.74,101.04 128.74,103.58 ; 132.55,117.461 132.55,104.85 135.09,104.85 135.09,120.09 132.55,120.09 132.55,118.939 ; 134.177,100.677 ccw(c131.28,104.85) 136.36,104.85 136.36,117.55 ccw(c131.28,117.55) 135.325,120.623 ; 138.21,112.691 138.21,117.555 cw(c143.29,117.555) 138.877,120.072 ; 138.334,103.737 ccw(c143.29,104.855) 142.19,99.895 ; 140.552,121.834 cw(c143.29,117.555) 142.148,122.505 ; 152.796,99.775 154.392,99.775 ; 152.796,122.635 154.392,122.635 ; 153.44,101.04 153.44,103.58 ; 157.26,117.466 157.26,104.855 159.8,104.855 159.8,120.095 157.26,120.095 157.26,118.934 ; 157.384,117.55 159.79,117.55 ; 158.879,100.677 ccw(c155.99,104.855) 161.07,104.855 161.07,117.555 ccw(c155.99,117.555) 160.039,120.623 ; 7.38,101.04 20.08,101.04 20.08,103.58 7.38,103.58 7.38,101.04 ; 32.08,101.04 32.08,103.58 44.78,103.58 44.78,101.04 32.08,101.04 ; 62.98,101.04 62.98,103.58 75.68,103.58 75.68,101.04 62.98,101.04 ; 87.68,101.04 87.68,103.58 100.38,103.58 100.38,101.04 87.68,101.04 ; 118.58,101.04 131.28,101.04 131.28,103.58 118.58,103.58 118.58,101.04 ; 143.29,101.045 143.29,103.585 155.99,103.585 155.99,101.045 143.29,101.045
  text "3" at 5.146,132.446 h1 r180
  text "1" at 16.946,132.446 h1 r180
  text "3" at 29.846,132.446 h1 r180
  text "1" at 41.646,132.446 h1 r180
  text "3" at 60.746,132.446 h1 r180
  text "1" at 72.546,132.446 h1 r180
  text "3" at 85.446,132.446 h1 r180
  text "1" at 97.246,132.446 h1 r180
  text "3" at 116.346,132.446 h1 r180
  text "1" at 128.146,132.446 h1 r180
  text "3" at 141.046,132.446 h1 r180
  text "1" at 152.846,132.446 h1 r180
  text "4" at 5.046,124.846 h1 r180
  text "2" at 17.146,124.846 h1 r180
  text "4" at 29.746,124.846 h1 r180
  text "2" at 41.846,124.846 h1 r180
  text "4" at 60.646,124.846 h1 r180
  text "2" at 72.746,124.846 h1 r180
  text "4" at 85.346,124.846 h1 r180
  text "2" at 97.446,124.846 h1 r180
  text "4" at 116.246,124.846 h1 r180
  text "2" at 128.346,124.846 h1 r180
  text "4" at 140.946,124.846 h1 r180
  text "2" at 153.046,124.846 h1 r180
  text "G" at 17.246,117.346 h1 r180
  text "G" at 41.946,117.346 h1 r180
  text "G" at 72.846,117.346 h1 r180
  text "G" at 97.546,117.346 h1 r180
  text "G" at 128.446,117.346 h1 r180
  text "G" at 153.146,117.346 h1 r180
  text "ANODE" at 9.746,116.046 h1 r180
  text "ANODE" at 34.446,116.046 h1 r180
  text "ANODE" at 65.346,116.046 h1 r180
  text "ANODE" at 90.046,116.046 h1 r180
  text "ANODE" at 120.946,116.046 h1 r180
  text "ANODE" at 145.646,116.046 h1 r180
  text "Tube" at 20.646,107.146 h1.2 r180
  text "Tube" at 45.346,107.146 h1.2 r180
  text "Tube" at 76.246,107.146 h1.2 r180
  text "Tube" at 100.946,107.146 h1.2 r180
  text "Tube" at 131.846,107.146 h1.2 r180
  text "Tube" at 156.546,107.146 h1.2 r180
  text "6" at 15,107.1 h2.2 r180
  text "5" at 39.7,107.1 h2.2 r180
  text "4" at 70.6,107.1 h2.2 r180
  text "3" at 95.3,107.1 h2.2 r180
  text "2" at 126.2,107.1 h2.2 r180
  text "1" at 150.9,107.1 h2.2 r180
  text "*" at 22.366,103.58 h1.52 r180
  text "*" at 47.066,103.58 h1.52 r180
  text "*" at 77.966,103.58 h1.52 r180
  text "*" at 102.666,103.58 h1.52 r180
  text "*" at 133.566,103.58 h1.52 r180
  text "*" at 158.266,103.58 h1.52 r180
  text "6" at 4.946,97.346 h1 r180
  text "5" at 17.146,97.346 h1 r180
  text "6" at 29.646,97.346 h1 r180
  text "5" at 41.846,97.346 h1 r180
  text "6" at 60.546,97.346 h1 r180
  text "5" at 72.746,97.346 h1 r180
  text "6" at 85.246,97.346 h1 r180
  text "5" at 97.446,97.346 h1 r180
  text "6" at 116.146,97.346 h1 r180
  text "5" at 128.346,97.346 h1 r180
  text "6" at 140.846,97.346 h1 r180
  text "5" at 153.046,97.346 h1 r180
  text "8" at 4.946,89.846 h1 r180
  text "7" at 17.046,89.846 h1 r180
  text "8" at 29.646,89.846 h1 r180
  text "7" at 41.746,89.846 h1 r180
  text "8" at 60.546,89.846 h1 r180
  text "7" at 72.646,89.846 h1 r180
  text "8" at 85.246,89.846 h1 r180
  text "7" at 97.346,89.846 h1 r180
  text "8" at 116.146,89.846 h1 r180
  text "7" at 128.246,89.846 h1 r180
  text "8" at 140.846,89.846 h1 r180
  text "7" at 152.946,89.846 h1 r180
  text "0" at 4.946,82.346 h1 r180
  text "0" at 29.646,82.346 h1 r180
  text "0" at 60.546,82.346 h1 r180
  text "0" at 85.246,82.346 h1 r180
  text "0" at 116.146,82.346 h1 r180
  text "0" at 140.846,82.346 h1 r180
  text "9" at 17.046,82.146 h1 r180
  text "9" at 41.746,82.146 h1 r180
  text "9" at 72.646,82.146 h1 r180
  text "9" at 97.346,82.146 h1 r180
  text "9" at 128.246,82.146 h1 r180
  text "9" at 152.946,82.146 h1 r180
  text "Tube control" at 67.004,74.439 h1
  text "Battery backup" at 95.054,74.187 h1
  text "170V supply" at 22.454,50.887 h1
  text "3V3 supply" at 21.354,46.387 h1
  text "STM32L433" at 16.354,41.454 h1
  text "5V IN" at 1.454,39.854 h1
  text "GPS" at 114.9,34.1 h1
  text "3V3" at 4.554,32.654 h1
  text "TX" at 4.554,30.254 h1
  text "RX" at 4.654,27.754 h1
  text "GND" at 4.654,25.154 h1
  text "NRF7002" at 17.054,19.554 h1
  text "Reset" at 32.654,16.054 h1
  text "Config / ON /  / OFF" at 113.5,14 h1
  text "Wi-Fi" at 4.054,12.454 h1
  text "time cannot be stopped" at 89.53,1.538 h1.52
  text "chronos   by james   MMXXVI" at 39.03,1.438 h1.52
  text "Debug" at 27.454,1.187 h1
Top Paste:
  region: 5.208,46.221 5.208,46.571 3.958,46.571 3.958,46.221
  region: 5.208,46.871 5.208,47.221 3.958,47.221 3.958,46.871
  region: 5.208,45.571 5.208,45.921 3.958,45.921 3.958,45.571
  region: 5.208,44.921 5.208,45.271 3.958,45.271 3.958,44.921
  region: 5.208,44.271 5.208,44.621 3.958,44.621 3.958,44.271
Mechanical 1:
  the board outline again, w1.2
Mechanical 13:
  circle w0.1: c4.05,55.775 r0.5
  lines w0.1: 108.6,15.8 109.8,15.8 109.8,18.9 108.6,18.9 ; 108.6,15.8 108.6,18.9 ; 108.6,15.8 108.8,15.8 108.8,18.9 108.6,18.9 ; 108.6,15.8 108.6,14 110,14 110,19 110,19.1 109.9,19.1 108.6,19.1 108.6,18.9 ; -0.828,48.747 -0.201,48.873 -0.201,48.619 -0.575,48.619 -0.603,42.781 -0.199,42.773 -0.733,42.529 -0.828,48.747 ; -0.625,42.596 -0.614,48.776 -0.614,48.796 -0.025,48.796 -0.025,49.196 -0.625,49.486 -0.614,49.716 -0.015,49.446 4.965,49.446 4.975,49.446 4.975,41.956 -0.004,41.956 -0.555,41.696 -0.614,41.716 -0.614,41.916 -0.025,42.206 -0.025,42.596 -0.625,42.596 ; 3.15,54.875 6.25,54.875 6.25,57.975 3.15,57.975 3.15,54.875
Top Courtyard:
  lines w0.05: 2.85,53.275 6.55,53.275 6.55,59.575 2.85,59.575 2.85,53.275
  lines w0.1: 4.2,56.425 5.2,56.425

## Text inside footprints (layer, text, board x,y; h text height)
DS1: Top Overlay "*" at 48.282,9.159 h1.27 r90; Mechanical 13 "RefDes2" at 73.809,31.384 h1.27 r90; Mechanical 13 "*" at 49.679,9.566 h1.27 r90
E2: Top Overlay "MOLEX 211624" at 126.446,3.754 h1.52 r90